# Altium PCB MPU-6050_Main_PCB.PcbDoc
Units mil, origin at the board's own origin, x right, y up, seen from the top; angles counter-clockwise.
Board outline 1000 x 600 mil, 2 copper layers (Top, Bottom), stack 61.811 mil thick; 17 components, 13 nets, 58 pads, 12 vias.
Unrouted connection lines stored in the file: 2.
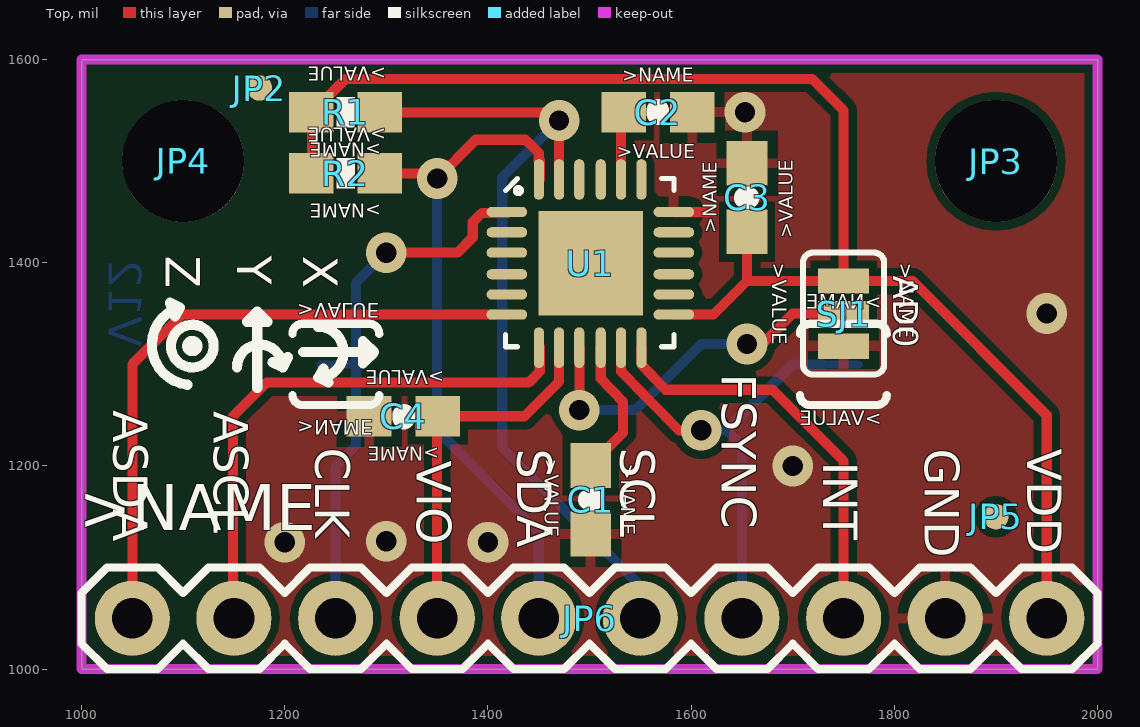
[diagram p0: Top view]
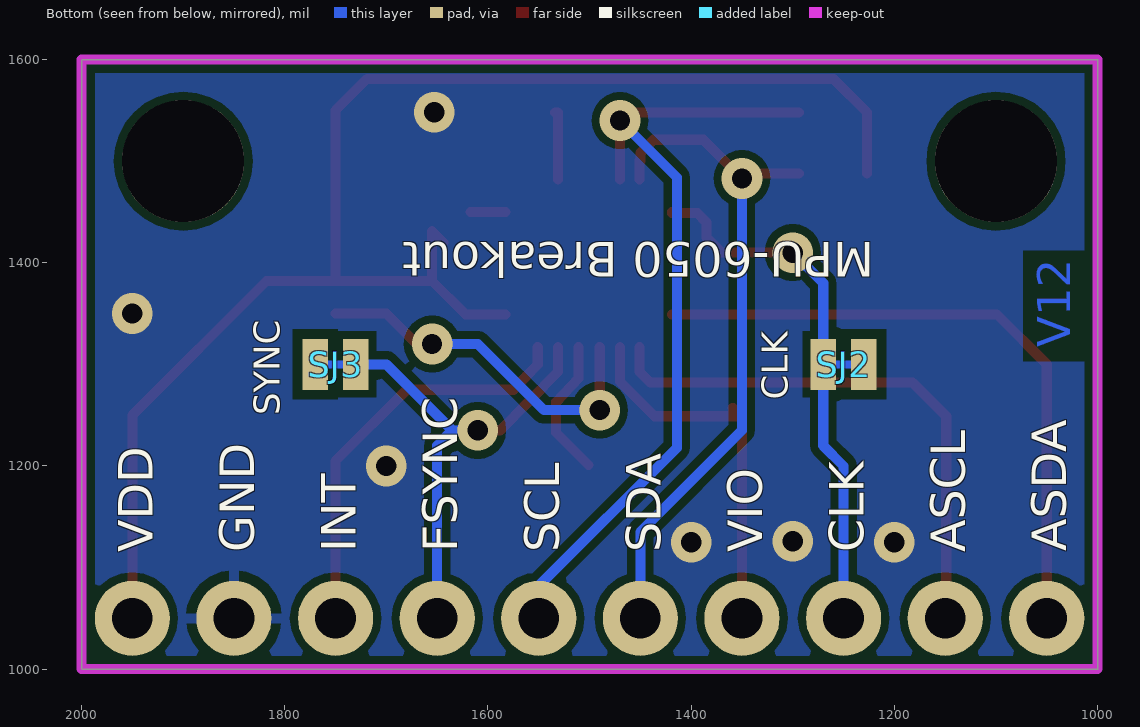
[diagram p1: Bottom view, seen from below]

## Layer stack, top to bottom
Top Solder: solder mask 0.4, Solder Resist, Dk 3.5
Top: signal copper 1.378
Dielectric 1: core 59.0551, FR-4, Dk 4.8
Bottom: signal copper 1.378
Bottom Solder: solder mask 0.4, Solder Resist, Dk 3.5

## Board outline
2000,1000 2000,1600 1000,1600 1000,1000

## Design rules (kind name [scope] priority, off if disabled: settings)
Clearance mdViaVia [IsVia vs IsVia] p1: gap=8
Clearance mdPadVia [IsPad vs IsVia] p2: gap=8
Clearance mdPadPad [IsPad vs IsPad] p3: gap=8
Clearance mdWireVia [(InLayerClass('Signal Layers') AND IsTrack) vs IsVia] p4: gap=8
Clearance mdWirePad [(InLayerClass('Signal Layers') AND IsTrack) vs IsPad] p5: gap=8
Clearance mdWireWire [(InLayerClass('Signal Layers') AND IsTrack) vs (InLayerClass('Signal Layers') AND IsTrack)] p6: gap=8
Clearance [All] p7: gap=8
HoleSize [All] p1: absolutevalues=TRUE maxlimit=100000 minlimit=15 maxpercent=80.000 minpercent=20.000
HoleToHoleClearance [All] p1: gap=8 allowstackedmicrovias=TRUE
PolygonConnect ThermalVias [IsVia] p1: connectstyle=Direct reliefconductorwidth=10 reliefentries=4 polygonreliefangle="90 Angle" airgapwidth=10
PolygonConnect [All] p2: connectstyle=Relief reliefconductorwidth=10 reliefentries=4 polygonreliefangle="90 Angle" airgapwidth=10
RoutingVias [All] p1: holewidth=28 width=50 viastyle="Through Hole" minholewidth=28 minwidth=50 maxholewidth=28 maxwidth=50
SilkToSilkClearance [All] p1 off: silktosilkclearance=10
SilkToSolderMaskClearance [IsPad] p1 off: minsilkscreentomaskgap=10 clearancetoexposedcopper=TRUE
SolderMaskExpansion [All] p1: expansion=4
Width [All] p1: maxlimit=100000 minlimit=7 preferedwidth=10
26 further rules are at their usual default settings.

## Components (designator, comment, footprint, x,y, rotation, side; value= is the part's Value field where it differs from the comment)
C1 "" 0603-CAP 1501,1167 r270 top
C2 "" 0603-CAP 1567,1548 r0 top
C3 "" 0603-CAP 1655,1464 r90 top
C4 "" 0603-CAP 1317,1249 r180 top
FRAME1 "" CREATIVE_COMMONS 470.78,600 r0 top
JP2 "" MICRO-FIDUCIAL 1175,1572 r270 top
JP3 "" STAND-OFF-TIGHT 1900,1500 r270 top
JP4 "" STAND-OFF-TIGHT 1100,1500 r270 top
JP5 "" MICRO-FIDUCIAL 1900,1150 r270 top
JP6 "" 1X10 1050,1050 r0 top
R1 "" 0603-RES 1260,1548 r180 top
R2 "" 0603-RES 1260,1488 r180 top
SJ1 "" SJ_3_PASTE2&3 1750,1350 r270 top
SJ2 "" SJ_2S-TRACE 1250,1300 r0 bottom
SJ3 "" SJ_2S-TRACE 1750,1300 r180 bottom
U1 "" QFN-24-4MM2 1500,1400 r0 top
U$5 "" REVISION 950,450 r0 top

## Footprints (in the part's own frame and the unit in brackets; to place one, negate y for a bottom-side part, rotate by r counter-clockwise, add the part's x,y. Pads: shape width x height; smd on the part's side, far side on the other; paste and mask are expansions set on the pad)
1X10 [mil] "1X10"
  round 74 hole 40: 1(0,0) 2(100,0) 3(200,0) 4(300,0) 5(400,0) 6(500,0) 7(600,0) 8(700,0) 9(800,0) 10(900,0)
  silkscreen extent -50,-50 950,50
0603-CAP [mil] "0603-CAP"
  rect 44x40 smd: 1(-33.46,0) 2(34,0)
  silkscreen extent 0,-1 0,2
0603-RES [mil] "0603-RES"
  rect 44x40 smd: 1(-33.46,0) 2(34,0)
  silkscreen extent -9,-15 9,15
CREATIVE_COMMONS [mil] "CREATIVE_COMMONS"
MICRO-FIDUCIAL [mil] "MICRO-FIDUCIAL"
  rrect100% 25x25 smd: 1(0,0)
QFN-24-4MM2 [mil] "QFN-24-4MM2"
  rrect100% 40x10 smd: 1(-81.35,50) 2(-81.35,30) 3(-81.35,10) 4(-81.35,-11.32) 5(-81.35,-31.18) 6(-81.35,-51.05) 13(83,-51.05) 14(83,-31.18) 15(83,-11.32) 16(83,10) 17(83,30) 18(83,50)
  rrect100% 10x40 smd: 7(-49.87,-83.53) 8(-30,-83.53) 9(-10.14,-83.53) 10(11,-83.53) 11(31,-83.53) 12(51,-83.53) 19(51,82) 20(31,82) 21(11,82) 22(-10.14,82) 23(-30,82) 24(-49.87,82)
  rect 103x103 smd: P$1(1,-0.39)
  silkscreen extent -83,-83 83,83
REVISION [mil] "REVISION"
SJ_2S-TRACE [mil] "SJ_2S-TRACE"
  rect 25x50 smd: 1(-20,0) 2(20,0)
  Top lines w8: -15,0 15,0
SJ_3_PASTE2&3 [mil] "SJ_3_PASTE2&3"
  rect 25x50 smd: 1(-32,0) 2(0,0) 3(32,0)
  silkscreen extent -60,-40 60,40
STAND-OFF-TIGHT [mil] "STAND-OFF-TIGHT"
  round 120 hole 120: 1(0,0)

## Part data
C1 C2 C3 C4: library part 0603-CAP
FRAME1: library part CREATIVE_COMMONS
JP2 JP5: library part MICRO-FIDUCIAL
JP3 JP4: library part STAND-OFF-TIGHT
JP6: library part 1X10
R1 R2: library part 0603-RES
SJ1: library part SJ_3_PASTE2&3
SJ2 SJ3: library part SJ_2S-TRACE
U1: library part QFN-24-4MM2
U$5: library part REVISION

## Via types
v1: diameter 40/40 (per signal layer), hole 20, Top to Bottom, 12 vias

## Nets (pads, with @x,y where several pads share a name; then routed paths per layer and width w, separated by ;. In a path a pad name is that pad's centre, name@x,y a point inside that pad or via, vN(x,y) a via of type N, cw(c..) or ccw(c..) an arc to the next point about the centre after c; other vN are vias at no path point)
ADO: SJ1.2 U1.9 | length 361.4
  Top w10: v1(1490,1255) 1490,1256 U1.9@1490,1317 ; v1(1655,1320) 1670,1320 1700,1350 SJ1.2
  Bottom w10: v1(1490,1255) 1545,1255 1610,1320 v1(1655,1320)
AUX_SCL: JP6.2 U1.7 | length 543.6
  Top w10: JP6.2 1149,1051 1149,1249 1182,1282 1440,1282 1451,1293 U1.7@1451,1317
AUX_SDA: JP6.1 U1.6 | length 639.3
  Top w10: JP6.1 1050,1300 1099,1349 U1.6@1419,1349
CLKIN: JP6.3 SJ2.2 U1.1 | length 525.7
  Top w10: v1(1300,1410) 1370,1410 1385,1425 1385,1440 1394,1449 1419,1449 U1.1@1419,1450
  Bottom w10: JP6.3 1250,1200 1270,1220 SJ2.2 1270,1380 v1(1300,1410)
FSYNC: JP6.7 SJ3.2 U1.11 | length 465.5
  Top w10: U1.11@1531,1317 1531,1293 1588,1235 v1(1610,1235)
  Bottom w10: v1(1610,1235) 1635,1235 ; JP6.7 1650,1220 1635,1235 ; SJ3.2 1700,1300 1635,1235
GND: C1.2 C2.2 C3.2 C4.2 JP6.9 SJ1.3 SJ2.1 SJ3.1 U1.18 | length 34
  Top w10: U1.18 1617,1450
  other v1: 1200,1125 1400,1125 1300,1126 1700,1200 1950,1350 1653,1548
INT: JP6.8 U1.12 | length 410.7
  Top w10: U1.12@1551,1317 1551,1300 1575,1275 1680,1275 1750,1205 JP6.8
N$3: C2.1 U1.20 | length 69
  Top w10: U1.20 1531,1548 C2.1@1534,1548
N$5: C1.1 U1.10 | length 138.1
  Top w10: C1.1@1501,1201 1533,1233 1533,1263 1511,1286 U1.10@1511,1317
SCL: JP6.6 R1.1 U1.23 | length 806.8
  Top w10: R1.1@1294,1548 1462,1548 v1(1470,1540) U1.23
  Bottom w10: v1(1470,1540) 1414,1484 1414,1218 1550,1082 JP6.6
SDA: JP6.5 R2.1 U1.24 | length 683.4
  Top w10: R2.1@1294,1488 1345,1488 v1(1350,1483) ; v1@1349,1482 v1(1350,1483) ; U1.24@1451,1482 1451,1501 1450,1500 1450,1508 1437,1521 1388,1521 v1(1350,1483)
  Bottom w10: v1(1350,1483) 1350,1235 1450,1135 JP6.5
VCC: C3.1 JP6.10 R1.2 R2.2 SJ1.1 U1.13 | length 1477.4
  Top w10: R2.2@1227,1488 1227,1548 1260,1581 1719,1581 1750,1550 SJ1.1 ; U1.13@1583,1349 1622,1349 1655,1382 ; C3.1@1644,1420 1655,1431 1655,1382 ; JP6.10 1950,1250 1818,1382 SJ1.1 ; 1655,1382 SJ1.1
VIO: C4.1 JP6.4 U1.8 | length 379.8
  Top w10: JP6.4 1350,1249 C4.1@1351,1249 ; C4.1@1352,1250 C4.1@1351,1249 ; C4.1@1359,1257 C4.1@1351,1249 ; U1.8@1470,1317 1470,1283 1436,1249 C4.1@1351,1249
pads on no net: JP2.1 JP3.1 JP4.1 JP5.1 U1.2 U1.3 U1.4 U1.5 U1.14 U1.15 U1.16 U1.17 U1.19 U1.21 U1.22 U1.P$1

## Polygon pours and split planes (outlines as drawn)
GND on Top "Top-GND" (solid, remove dead copper, pour order 2): 2005,1605 995,1605 995,995 2005,995
GND on Bottom "Bottom-GND" (solid, remove dead copper, pour order 4): 2005,1605 995,1605 995,995 2005,995

## Keep-outs
Keep-Out Layer:
  the board outline again, w10

## Other copper
Bottom:
  text "V12" at 1027,1317 h32.3 r270

## Silkscreen, mask and mechanical layers (free items; w line width, h text height)
Top Overlay:
  circle w10: c1109,1318 r5
  circle w10: c1109,1318 r21
  lines w10: 1095,1356 ccw(c1108.49,1319.06) 1104,1280 ; 1153,1297 cw(c1175.5,1297) 1198,1297 ; 1173,1277 1173,1352 ; 1218,1312 1288,1312 ; 1233,1337 cw(c1233,1312) 1233,1287 ; 1277,1301 1277,1323 ; 1278,1302 1288,1312 ; 1278,1322 1288,1312 ; 1173,1352 1163,1342 1183,1342 1173,1352 ; 1198,1297 1203,1307 1188,1302 1198,1297 ; 1233,1287 1243,1282 1238,1296 1233,1287 ; 1087,1361 1097,1356 1092,1347 1087,1361
  text "Z" at 1083,1407 h34 r270
  text "Y" at 1153,1407 h34 r270
  text "X" at 1218,1407 h34 r270
  text "AD0" at 1799,1387 h24.65 r270
  text "FSYNC" at 1630,1291 h34 r270
  text "ASDA" at 1031,1255 h34 r270
  text "ASCL" at 1130,1254 h34 r270
  text "CLK" at 1230,1218 h34 r270
  text "SCL" at 1530,1218 h34 r270
  text "SDA" at 1429,1217 h34 r270
  text "GND" at 1830,1217 h34 r270
  text "VDD" at 1931,1217 h34 r270
  text "VIO" at 1330,1205 h34 r270
  text "INT" at 1730,1204 h34 r270
Bottom Overlay:
  text "MPU-6050 Breakout" at 1220,1420 h34 r180
  text "CLK" at 1305,1265 h25.5 r270
  text "SYNC" at 1805,1250 h25.5 r270
  text "ASDA" at 1031,1116 h34 r270
  text "ASCL" at 1130,1115 h34 r270
  text "CLK" at 1230,1115 h34 r270
  text "VIO" at 1330,1115 h34 r270
  text "SDA" at 1430,1115 h34 r270
  text "SCL" at 1530,1115 h34 r270
  text "FSYNC" at 1630,1115 h34 r270
  text "INT" at 1730,1115 h34 r270
  text "GND" at 1830,1115 h34 r270
  text "VDD" at 1930,1115 h34 r270
Dimension:
  the board outline again, w10

## Text inside footprints (layer, text, board x,y; h text height)
C1: Top Overlay ">NAME" at 1531,1202 h13.6 r270; Top Overlay ">VALUE" at 1456,1207 h13.6 r270
C2: Top Overlay ">NAME" at 1532,1578 h13.6; Top Overlay ">VALUE" at 1527,1503 h13.6
C3: Top Overlay ">NAME" at 1625,1429 h13.6 r90; Top Overlay ">VALUE" at 1700,1424 h13.6 r90
C4: Top Overlay ">NAME" at 1352,1219 h13.6 r180; Top Overlay ">VALUE" at 1357,1294 h13.6 r180
JP6: Top Overlay ">NAME" at 997,1122 h77.5
R1: Top Overlay ">NAME" at 1295,1518 h13.6 r180; Top Overlay ">VALUE" at 1300,1593 h13.6 r180
R2: Top Overlay ">NAME" at 1295,1458 h13.6 r180; Top Overlay ">VALUE" at 1300,1533 h13.6 r180
SJ1: Top Overlay ">NAME" at 1800,1400 h24.8 r270; Top Overlay ">VALUE" at 1750,1353.94 h1.55 r270; Top Overlay ">VALUE" at 1675,1400 h24.8 r270; tDocu "PASTE" at 1732.5,1347 h15.5 r310
SJ2: Top Overlay ">NAME" at 1212.5,1250 h24.8 r180; Top Overlay ">VALUE" at 1212.5,1365 h24.8 r180
SJ3: Top Overlay ">NAME" at 1787.5,1350 h24.8; Top Overlay ">VALUE" at 1787.5,1235 h24.8
U1: tDocu "Y" at 1476.38,1440 h15.5; tDocu "X" at 1544,1416 h15.5; tDocu "Z" at 1496.06,1376.38 h15.5; Mechanical 57 "C:/Documents and Settings/jbartlett/Desktop/mpu-6050.bmp" at 1421.91,1317.13 h1.7